# Altium PCB PCB_BSPD_Main.PcbDoc
Units mm, origin at the board's own origin, x right, y up, seen from the top; angles counter-clockwise.
Board outline 58.93 x 45.21 mm, 4 copper layers (Top Layer, Int1, Int2, Bottom Layer), stack 1.369 mm thick; 80 components, 58 nets, 239 pads, 90 vias.
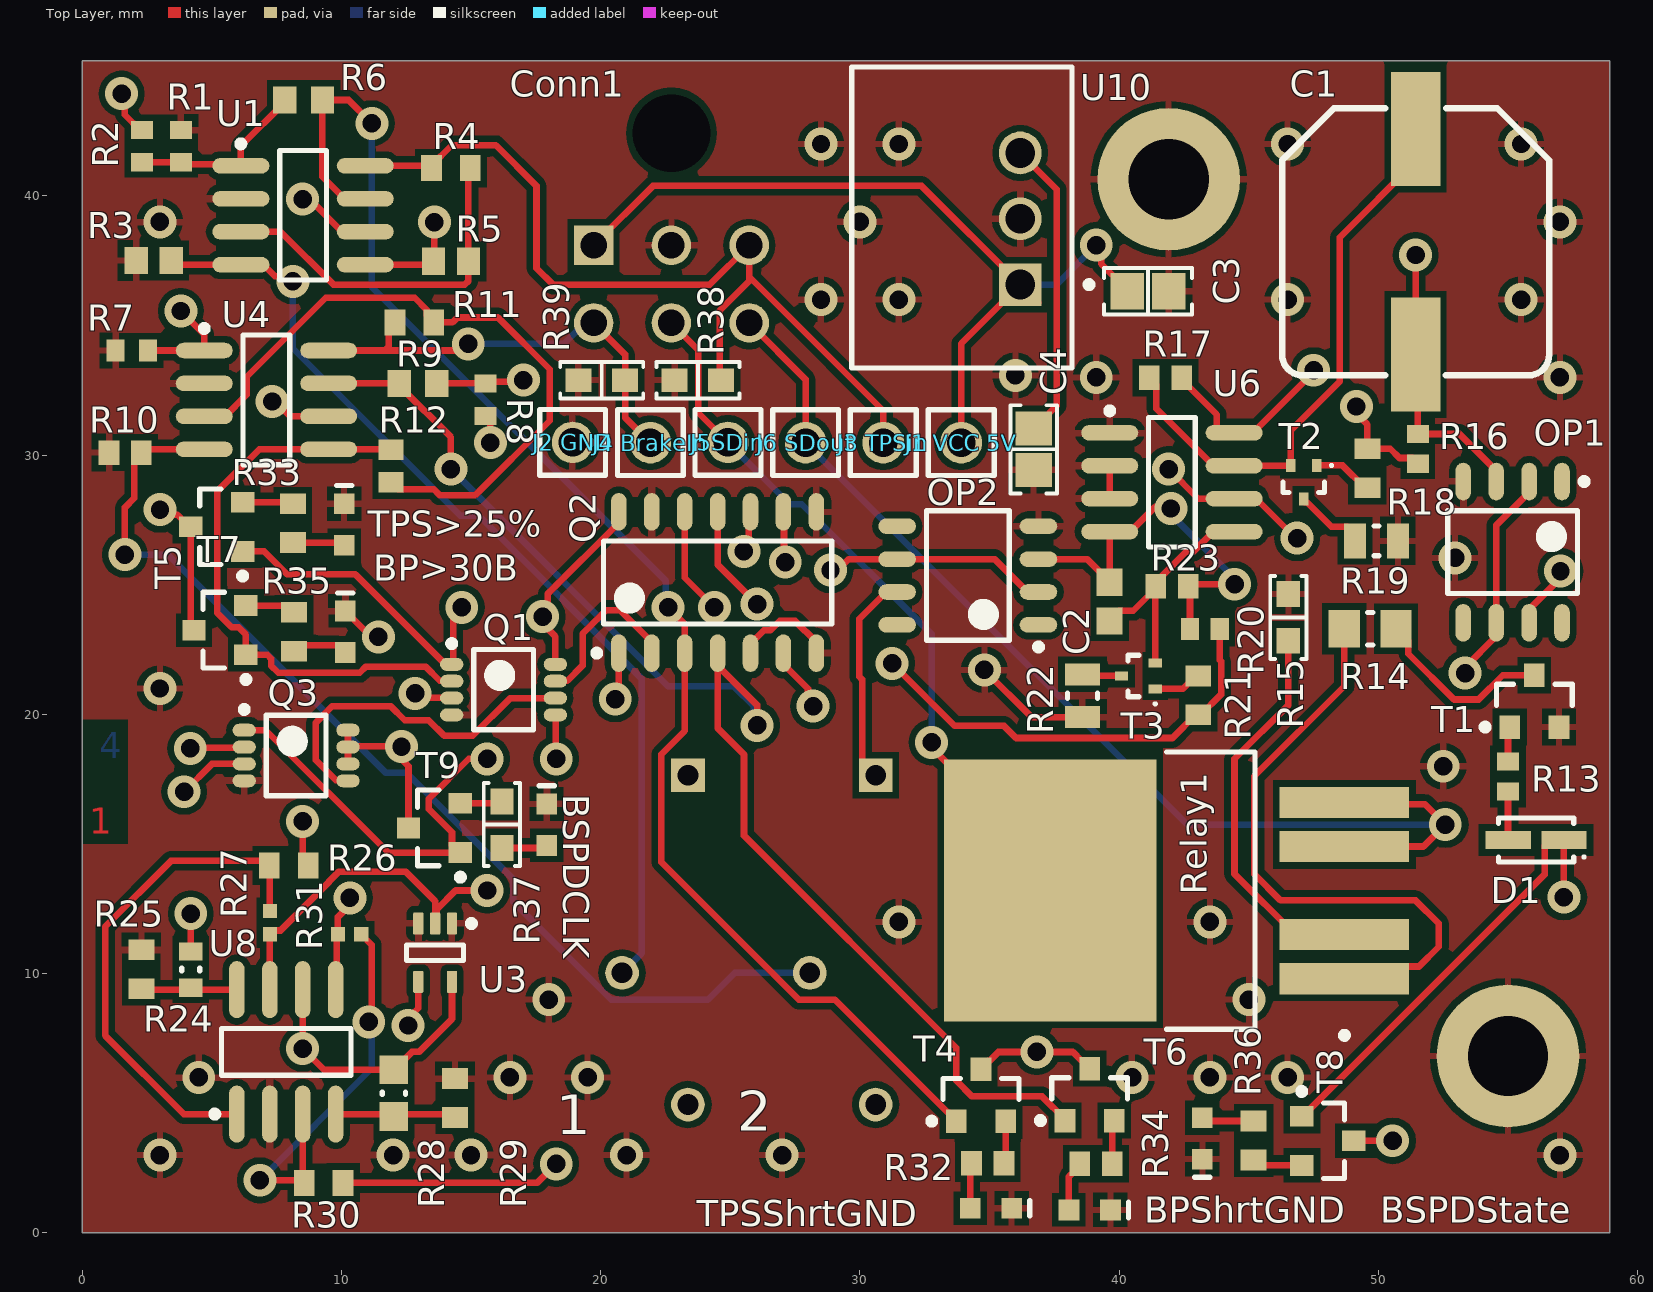
[diagram p0: Top Layer view]
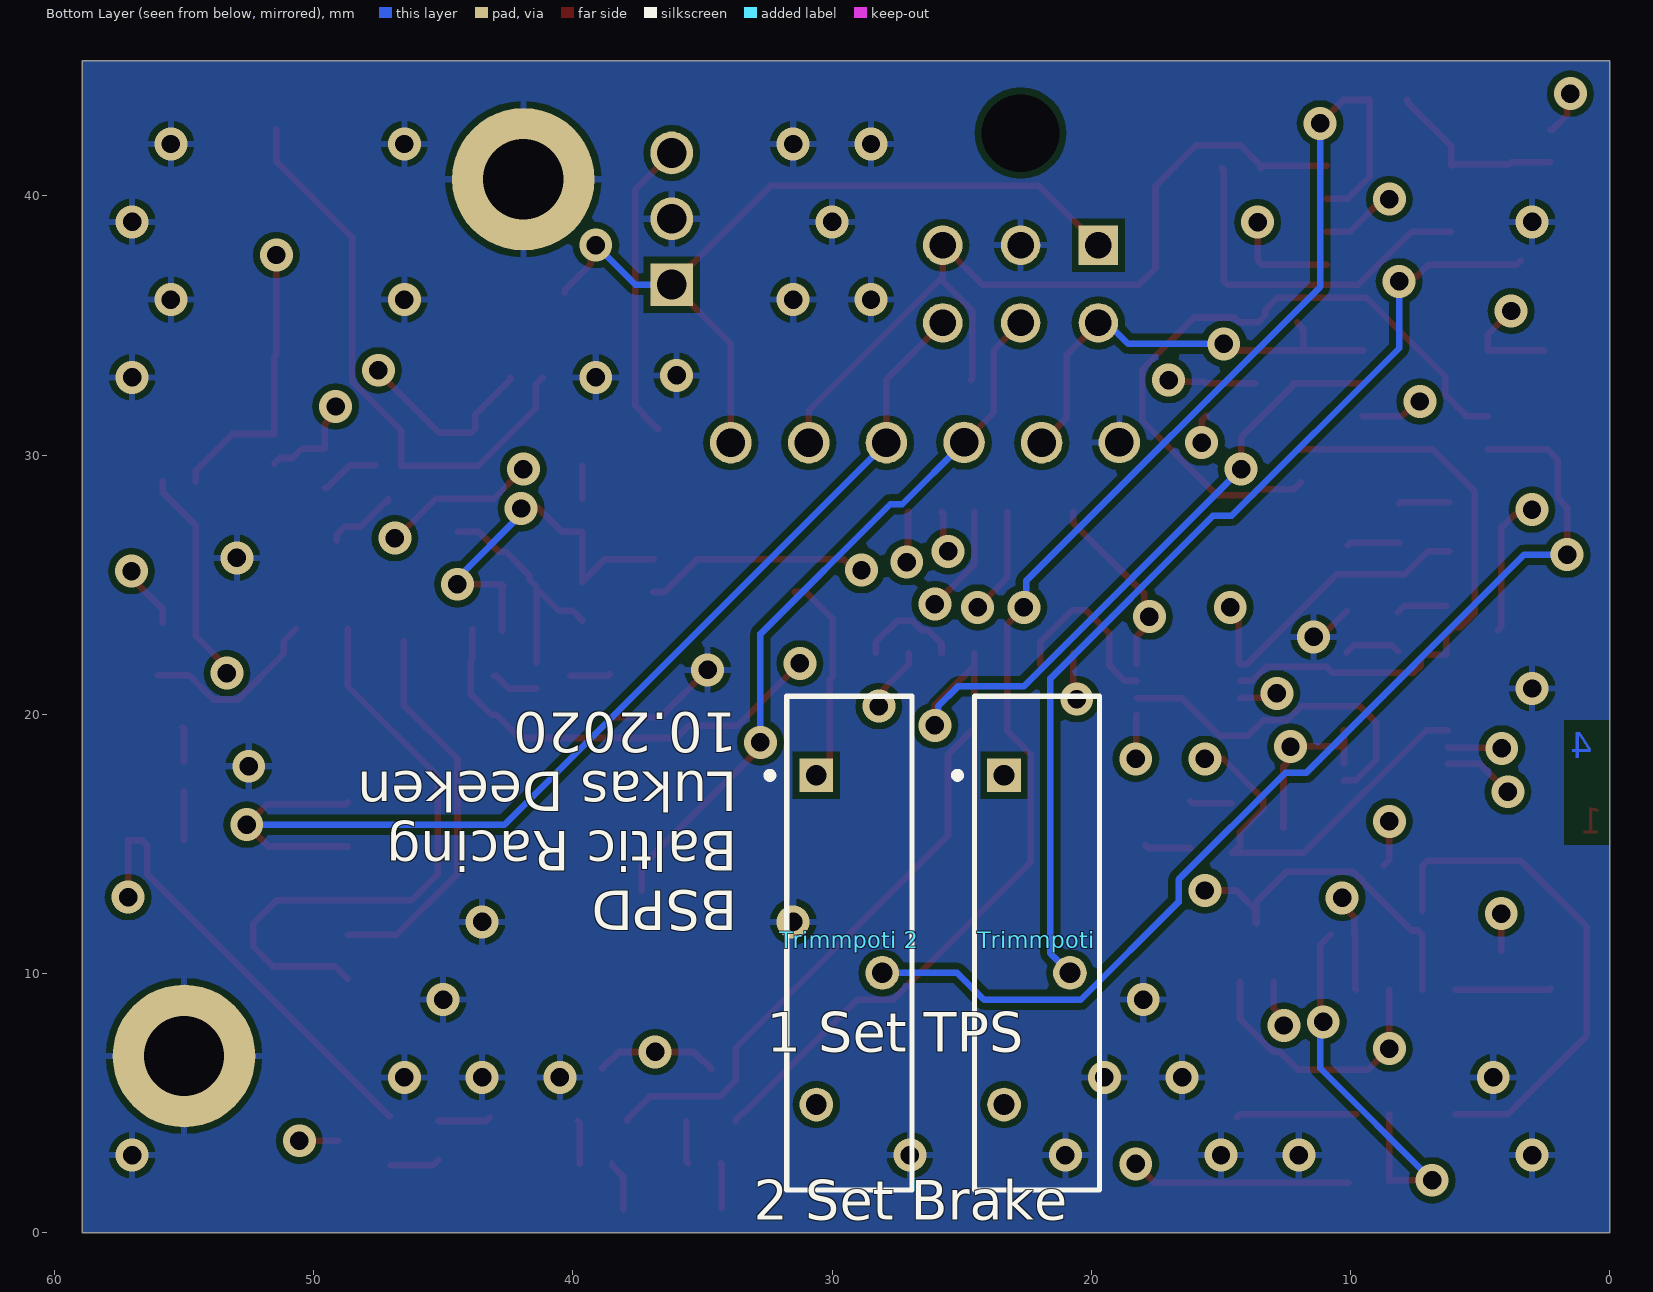
[diagram p1: Bottom Layer view, seen from below]
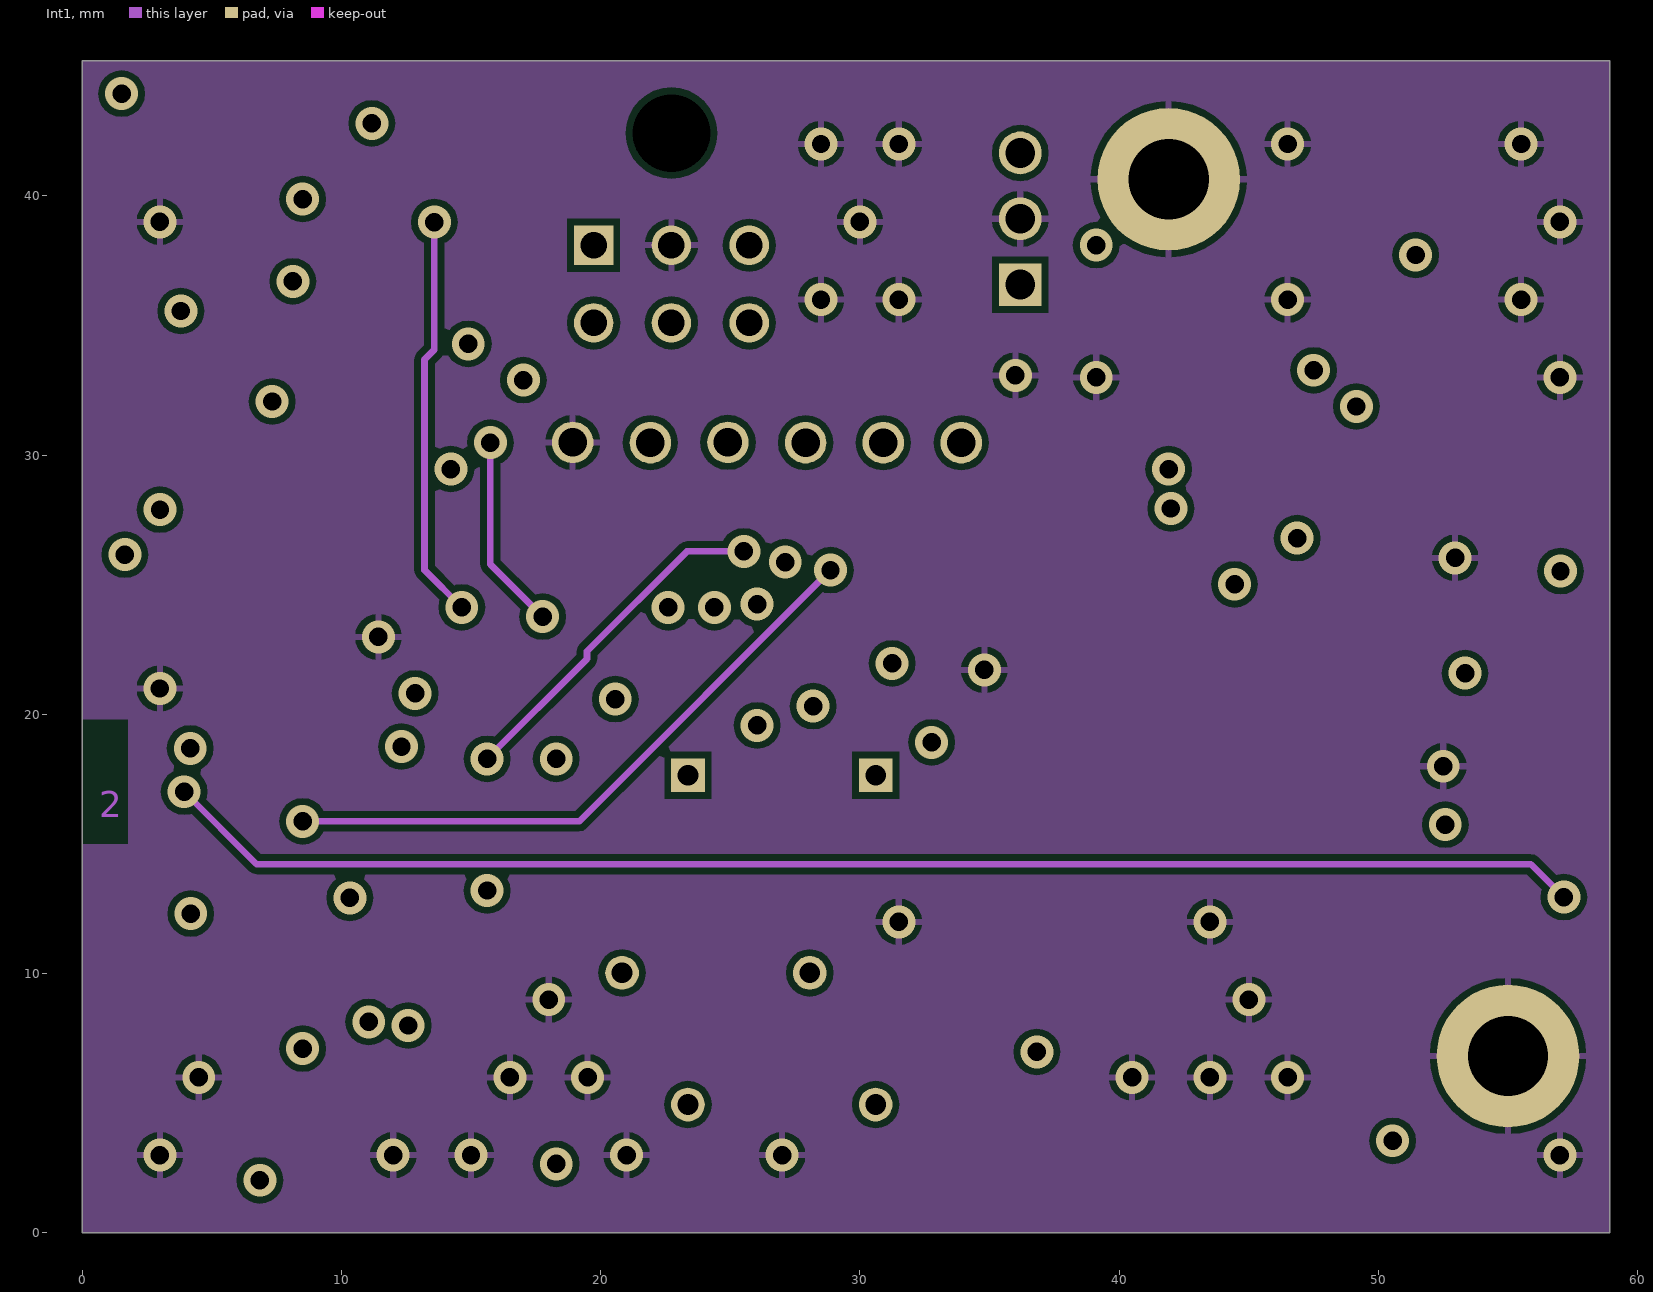
[diagram p2: Int1]
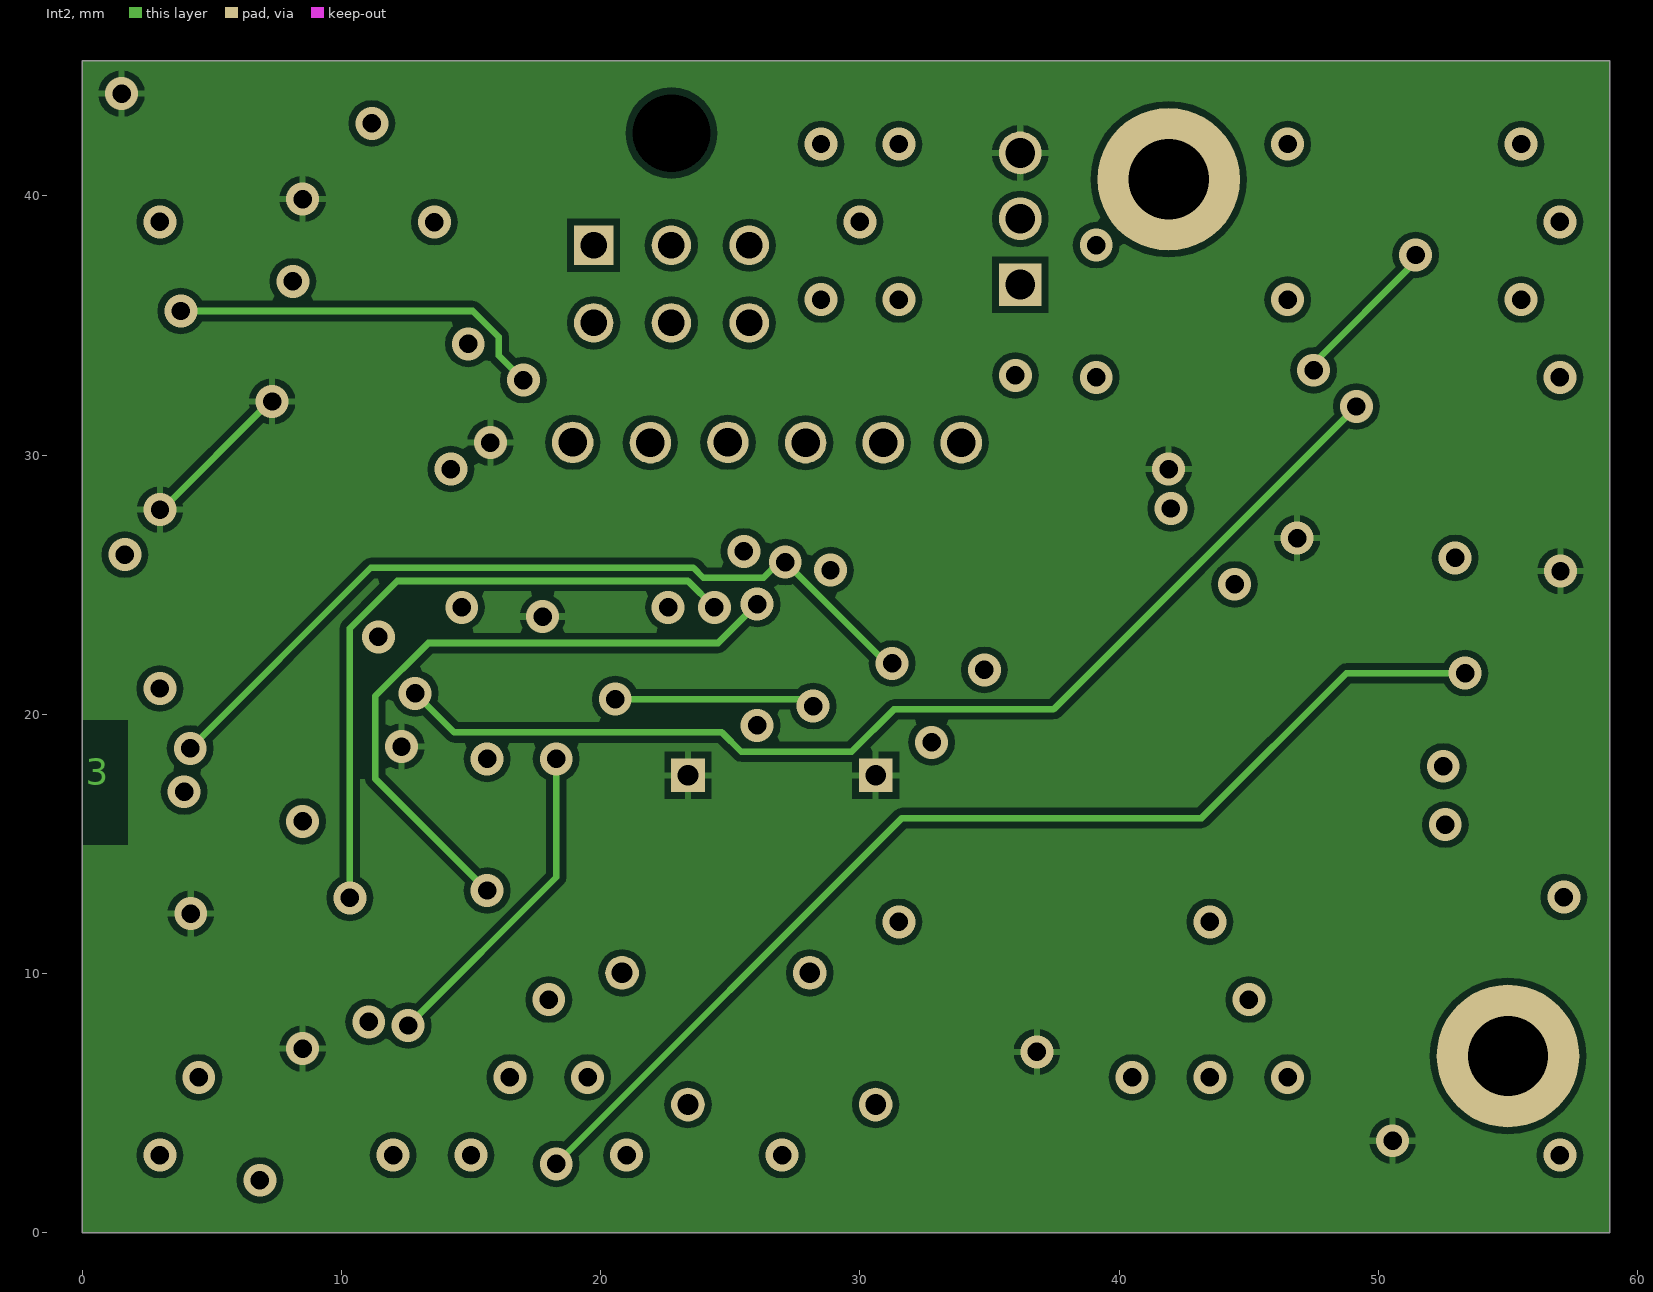
[diagram p3: Int2]

## Layer stack, top to bottom
Top Solder: solder mask 0.0254, SM-001, Dk 4
Top Layer: signal copper 0.035
Dielectric 1: prepreg 0.1295, PP-017, Dk 4.3
Dielectric 2: prepreg 0.1295, PP-017, Dk 4.3
Int1: signal copper 0.035
Dielectric 3: core 0.7112, Core-039, Dk 4.8
Int2: signal copper 0.035
Dielectric 4: prepreg 0.1295, PP-017, Dk 4.3
Dielectric 5: prepreg 0.1295, PP-017, Dk 4.3
Bottom Layer: signal copper 0.035
Bottom Solder: solder mask 0.0254, SM-001, Dk 4

## Board outline
0,0 58.928,0 58.928,45.212 0,45.212

## Design rules (kind name [scope] priority, off if disabled: settings)
Clearance [All] p1: gap=0.254 ignorepadtopadclearanceinfootprint=FALSE except(0: Arc-Hole Track-Hole SMDPad-Hole THPad-Hole Via-Hole Fill-Hole Poly-Hole Region-Hole Text-Hole)
PolygonConnect [All] p1: connectstyle=Relief reliefconductorwidth=0.254 reliefentries=4 polygonreliefangle="90 Angle" airgapwidth=0.254
RoutingVias [All] p1: holewidth=0.711 width=1.27 viastyle="Through Hole" minholewidth=0.711 minwidth=1.27 maxholewidth=0.711 maxwidth=1.27
SolderMaskExpansion [All] p1: expansion=0.102 istentingtop=FALSE
Width [All] p1: maxlimit=0.254 minlimit=0.254 preferedwidth=0.254
30 further rules are at their usual default settings.

## Components (designator, comment, footprint, x,y, rotation, side; value= is the part's Value field where it differs from the comment)
BP>30B "150060GS75000" 0603_A 10.152,23.187 r270 top
BPShrtGND "150060RS75000" 0603_A 38.862,0.889 r180 top
BSPDCLK "150060BS75000" 0603_A 17.923,15.748 r270 top
BSPDState "150060GS75000" 0603_A 43.209,3.645 r90 top
C1 "875075561006" WCAP-PSLC_10x12.4 51.435,38.227 r90 top value=150uF
C2 "C0603C335M9PACTU" CAPC1608X90X35NL15T15 39.63,24.352 r270 top
C3 "SMD Capacitor" "CAP 0805/2012" 41.114,36.322 r180 top value=10uF
C4 "SMD Capacitor" "CAP 0805/2012" 36.703,30.226 r90 top value=10uF
Conn1 "43045-0600" 43045-0600 22.73,38.098 r180 top
D1 "BAT46WH" DIOM2715X18N 56.082,15.152 r180 top
"J1 VCC 5V" "61300111121" 61300111121 33.909,30.48 r270 top
"J2 GND" "61300111121" 61300111121 18.923,30.491 r270 top
"J3 TPSin" "61300111121" 61300111121 30.9,30.48 r270 top
"J4 BrakeIn" "61300111121" 61300111121 21.917,30.48 r270 top
J5SDin "61300111121" 61300111121 24.912,30.491 r270 top
"J6 SDout" "61300111121" 61300111121 27.906,30.48 r90 top
OP1 "AD711" "SOIC8; SOIC127P600X175-8N" 55.175,26.257 r270 top
OP2 "AD711" "SOIC8; SOIC127P600X175-8N" 34.163,25.357 r180 top
Q1 "Dual 2 input AND gate" "TSSOP8; TSOP65P400X110-8N" 16.256,20.955 r0 top
Q2 "Triple Input OR Gate" "SOIC14; SOIC127P600X175-14N" 24.511,25.088 r90 top
Q3 "74LVC1G74" "TSSOP8; TSOP65P400X110-8N" 8.255,18.415 r0 top
R1 "ERJ-3EKF1022V" RESC1608X55X30LL15T15 3.81,41.92 r90 top
R2 "ERJ-3EKF4753V" RESC1608X55X30LL15T15 2.306,41.919 r270 top
R3 "CRCW060325K5FKEA" RESC1609X50X30ML10T20 2.76,37.502 r0 top
R4 "RC0603FR-0710KL" RESC1608X55X25ML10T15 14.226,41.072 r0 top
R5 "CRCW0603402KFKEA" RESC1609X50X30ML10T20 14.226,37.475 r180 top
R6 "ERJ-3EKF2433V" RESC1608X55X30ML15T15 8.546,43.698 r0 top
R7 "ERJ-3EKF1022V" RESC1608X55X30LL15T15 1.915,34.036 r180 top
R8 "ERJ-3EKF4753V" RESC1608X55X30LL15T15 15.558,32.141 r90 top
R9 "ERJ-3EKF2433V" RESC1608X55X30ML15T15 12.954,32.766 r180 top
R10 "CRCW060313K0FKEA" RESC1609X50X30NL10T20 1.661,30.099 r0 top
R11 "RC0603FR-0710KL" RESC1608X55X25ML10T15 12.816,35.12 r0 top
R12 "CRCW0603249KFKEA" RESC1609X50X30NL10T20 11.916,29.581 r90 top
R13 "CRCW060330K0FKEA" RESC1609X50X30LL10T20 54.998,17.606 r90 top
R14 "RC0805FR-071KL" RESC2013X60X35ML10T20 49.68,23.304 r180 top
R15 "SMD Resistor" "STACKPOLE CSR0603" 46.526,23.741 r270 top value="510 0603"
R16 "CRCW060397K6FKEA" RESC1609X50X30LL10T20 51.521,30.242 r90 top
R17 "CRCW0603499KFKEA" RESC1609X50X30NL10T20 41.789,32.99 r180 top
R18 "RC0603FR-07100KL" RESC1608X55X25ML10T15 49.574,29.497 r270 top
R19 "CRCW0805100RFKEA" RESC2013X50X30LL20T20 49.924,26.693 r0 top
R20 "CRCW060397K6FKEA" RESC1609X50X30LL10T20 43.307,23.289 r180 top
R21 "RC0603FR-07100KL" RESC1608X55X25ML10T15 43.05,20.735 r90 top
R22 "CRCW0805100RFKEA" RESC2013X50X30LL20T20 38.585,20.723 r270 top
R23 "CRCW0603499KFKEA" RESC1609X50X30NL10T20 42.037,24.943 r180 top
R24 "51K1 1% 0603(1608)" RESC0603(1608)_L 4.191,10.16 r90 top value="51100.00 Ohm"
R25 "RC0603FR-07100KL" RESC1608X55X25ML10T15 2.286,10.172 r270 top
R26 "RC0603FR-0710KL" RESC1608X55X25ML10T15 7.973,14.171 r180 top
R27 "ERJ-2RKF1243X" RESC1005X40X25NL05T05 7.245,11.967 r270 top
R28 "118K 1% 0603(1608)" RESC0603(1608)_M 12.028,5.391 r90 top value="118000.00 Ohm"
R29 "RC0603FR-07100KL" RESC1608X55X25ML10T15 14.382,5.207 r270 top
R30 "RC0603FR-0710KL" RESC1608X55X25ML10T15 9.318,1.929 r180 top
R31 "ERJ-2RKF1243X" RESC1005X40X25NL05T05 10.318,11.517 r180 top
R32 "CRCW0603130KFKEA" RESC1609X50X30NL10T20 34.931,2.681 r0 top
R33 "RC0603FR-07100RL" RESC1608X55X25ML10T15 8.128,27.377 r270 top
R34 "CRCW0603130KFKEA" RESC1609X50X30NL10T20 39.106,2.667 r0 top
R35 "RC0603FR-07100RL" RESC1608X55X25ML10T15 8.172,23.187 r270 top
R36 "RC0603FR-07100RL" RESC1608X55X25ML10T15 45.188,3.568 r90 top
R37 "SMD Resistor" "STACKPOLE CSR0603" 16.193,15.748 r90 top value="500 0603"
R38 "SMD Resistor" "STACKPOLE CSR0603" 23.749,32.89 r180 top value="100k 0603"
R39 "SMD Resistor" "STACKPOLE CSR0603" 20.045,32.89 r180 top value="100k 0603"
Relay1 "AUIR3313S" "D2PAK5 ;DPAK228P1524X483-5N" 41.538,13.205 r180 top
T1 "BC848BLT1G" ONSC-SOT-23-3-318-08_V 56.014,20.51 r90 top
T2 "MMBT3906TT1G" ONSC-SC-75-3-463-01_V 47.117,28.956 r270 top
T3 "MMBT3906TT1G" ONSC-SC-75-3-463-01_V 40.744,21.485 r180 top
T4 "BC848BLT1G" ONSC-SOT-23-3-318-08_V 34.671,5.31 r90 top
T5 "BC848BLT1G" ONSC-SOT-23-3-318-08_V 5.191,27.238 r180 top
T6 "BC848BLT1G" ONSC-SOT-23-3-318-08_V 38.862,5.334 r90 top
T7 "BC848BLT1G" ONSC-SOT-23-3-318-08_V 5.318,23.248 r180 top
T8 "BC848BLT1G" ONSC-SOT-23-3-318-08_V 48.042,3.556 r0 top
T9 "BC848BLT1G" ONSC-SOT-23-3-318-08_V 13.589,15.621 r180 top
TPS>25% "150060GS75000" 0603_A 10.107,27.327 r270 top
TPSShrtGND "150060RS75000" 0603_A 35.052,0.952 r180 top
Trimmpoti "3006P-1-104ZLF" BOUR-3006P-3_V 22.098,11.176 r270 bottom
"Trimmpoti 2" "3006P-1-104ZLF" BOUR-3006P-3_V 29.337,11.176 r270 bottom
U1 "LT1017IS8#PBF" LT-S8_N 8.522,39.253 r0 top
U3 "Inverter SN74LVC1G04DCKR" DCK0005A_N 13.617,10.81 r270 top
U4 "LT1017IS8#PBF" LT-S8_N 7.112,32.131 r0 top
U6 "LT1017IS8#PBF" LT-S8_N 42.037,28.956 r0 top
U8 "LT1017IS8#PBF" LT-S8_N 7.874,6.985 r90 top
U10 "R-78E5.0-0.5" REPO-R-78E-0.5-3_V 36.185,39.116 r90 top

## Footprints (in the part's own frame and the unit in brackets; to place one, negate y for a bottom-side part, rotate by r counter-clockwise, add the part's x,y. Pads: shape width x height; smd on the part's side, far side on the other; paste and mask are expansions set on the pad)
0603_A [mm] "Chip LED, 2-Leads, Body 1.6x0.8mm, IPC Medium Density"
  rect 0.8x0.8 smd: 1(-0.8,0) 2(0.8,0)
  silkscreen extent -1.5,-0.3 -1.5,0.3, body extent -0.8,-0.4 0.8,0.4, height 0.7
43045-0600 [mm] "Micro-Fit 3.0 Right Angle Header, 3.00mm Pitch, Dual Row, 6 Circuits"
  rect 1.524x1.524 hole 1.02: 1(3,0)
  round 1.524 hole 1.02: 2(0,0) 3(-3,0) 4(3,3) 5(0,3) 6(-3,3)
  round 0 hole 3 unplated: ""(0,-4.32)
  body extent -6.57,-8.95 6.57,3.29, height 8.83
61300111121 [mm] "1pins, 1 row, straight, gold plating"
  round 1.6 hole 1.1: 1(0,0)
  silkscreen extent -1.27,-1.27 1.27,1.27, body extent -1.27,-1.27 1.27,1.27, height 8.57
BOUR-3006P-3_V [mm] "THD, 3-Leads, Body 19.05x4.83mm, Height 6.6mm"
  rect 1.3x1.3 hole 0.8: 1(-6.475,-1.27)
  round 1.3 hole 0.8: 2(1.145,1.27) 3(6.225,-1.27)
  silkscreen extent -9.53,-3.19 9.52,2.41, body extent -9.53,-2.41 11.05,2.41, height 6.6
"CAP 0805/2012" [mm] "Chip Capacitor, 2-Leads, Body 2.00x1.20mm, IPC Medium Density"
  rect 1.3x1.4 smd: 1(-0.8,0) 2(0.8,0)
  silkscreen extent -1.7,-0.9 1.7,0.9, body extent -1,-0.64 1,0.64, height 1.26
CAPC1608X90X35NL15T15 [mm] "Chip Capacitor, 2-Leads, Body 1.60x0.81mm, IPC Medium Density"
  rect 1.05x1 smd: 1(-0.75,0) 2(0.75,0)
  body extent -0.88,-0.48 0.87,0.48, height 0.9
"D2PAK5 ;DPAK228P1524X483-5N" [mm] "D2-PAK, 5-Pads, Body 7,93x8,70mm (max), IPC Medium Density"
  rect 5x1.2 smd: 1(-7.15,3.4) 2(-7.15,1.7) 4(-7.15,-1.7) 5(-7.15,-3.4)
  rect 8.2x10.1 smd: 3(4.2,0)
  silkscreen extent -7.28,-5.35 -0.3,5.71, body extent -7.51,-5.33 7.74,5.33, height 4.83
DCK0005A_N [mm] "SOT23, 5-Leads, Body 2.15x1.4mm, Pitch 0.65mm, IPC Medium Density"
  rrect25% 0.85x0.4 smd: 1(-1.125,0.65) 2(-1.125,0) 3(-1.125,-0.65) 4(1.125,-0.65) 5(1.125,0.65)
  silkscreen extent -1.25,-1.1 0.3,1.53, body extent -1.14,-1 1.14,1, height 0.94
DIOM2715X18N [mm] "Molded Diode, 2-Leads, Body 2,70x1,55mm, IPC Medium Density"
  rect 1.75x0.7 smd: 1(-1.075,0) 2(1.075,0)
  silkscreen extent -1.9,-0.85 1.45,0.85, body extent -1.65,-0.85 1.65,0.85, height 1.8
LT-S8_N [mm] "SOP, 8-Leads, Body 4.9x3.9mm, Pitch 1.27mm, IPC Medium Density"
  oval 2.2x0.6 smd: 1(-2.4,1.905) 2(-2.4,0.635) 3(-2.4,-0.635) 4(-2.4,-1.905) 5(2.4,-1.905) 6(2.4,-0.635) 7(2.4,0.635) 8(2.4,1.905)
  silkscreen extent -2.52,-2.5 0.9,2.88, body extent -2,-2.5 2,2.5, height 1.76
ONSC-SC-75-3-463-01_V [mil] "SOT23, 3-Leads, Body 1.6x0.8mm, Pitch 0.5mm"
  rect 20x14.02 smd: 1(-25.49,19.69) 2(-25.49,-19.69) 3(25.49,0)
  silkscreen extent -27,-31 16,44, body extent -16,-31 16,31, height 35
ONSC-SOT-23-3-318-08_V [mm] "SOT23, 3-Leads, Body 2.92x1.3mm, Pitch 0.95mm"
  rect 0.9x0.8 smd: 1(-1,0.95) 2(-1,-0.95) 3(1,0)
  silkscreen extent -1.12,-1.46 0.65,2.02, body extent -0.65,-1.46 0.65,1.46, height 1.11
REPO-R-78E-0.5-3_V [mm] "THD, 3-Leads, Body 11.6x8.5mm, Pitch 2.54mm"
  rect 1.65x1.65 hole 1.15: 1(-2.54,0)
  round 1.65 hole 1.15: 2(0,0) 3(2.54,0)
  silkscreen extent -5.75,-2.78 5.85,6.5, body extent -5.75,-2 5.85,6.5, height 10.4
RESC0603(1608)_L [mm] "Chip Resistor, Body 1.6x0.8mm, IPC High Density"
  rect 0.7x0.9 smd: 1(-0.7,0) 2(0.7,0)
  silkscreen extent -0.05,-0.35 0.05,0.35, body extent -0.85,-0.47 0.85,0.47, height 0.6
RESC0603(1608)_M [mm] "Chip Resistor, Body 1.6x0.8mm, IPC Low Density"
  rect 1.1x1.1 smd: 1(-0.9,0) 2(0.9,0)
  silkscreen extent -0.05,-0.45 0.05,0.45, body extent -0.85,-0.47 0.85,0.47, height 0.6
RESC1005X40X25NL05T05 [mm] "Chip Resistor, 2-Leads, Body 1.00x0.50mm, IPC Medium Density"
  rect 0.55x0.55 smd: 1(-0.45,0) 2(0.45,0)
  body extent -0.53,-0.27 0.53,0.28, height 0.4
RESC1608X55X25ML10T15 [mm] "Chip Resistor, 2-Leads, Body 1.60x0.80mm, IPC Low Density"
  rect 0.8x1 smd: 1(-0.75,0) 2(0.75,0)
  body extent -0.85,-0.45 0.85,0.45, height 0.55
RESC1608X55X30LL15T15 [mm] "Chip Resistor, 2-Leads, Body 1.60x0.80mm, IPC High Density"
  rect 0.7x0.85 smd: 1(-0.625,0) 2(0.625,0)
  body extent -0.87,-0.48 0.87,0.48, height 0.55
RESC1608X55X30ML15T15 [mm] "Chip Resistor, 2-Leads, Body 1.60x0.80mm, IPC Low Density"
  rect 0.9x1.05 smd: 1(-0.725,0) 2(0.725,0)
  body extent -0.87,-0.48 0.87,0.48, height 0.55
RESC1609X50X30LL10T20 [mm] "Chip Resistor, 2-Leads, Body 1.55x0.85mm, IPC High Density"
  rect 0.7x0.85 smd: 1(-0.575,0) 2(0.575,0)
  body extent -0.82,-0.48 0.82,0.48, height 0.5
RESC1609X50X30ML10T20 [mm] "Chip Resistor, 2-Leads, Body 1.55x0.85mm, IPC Low Density"
  rect 0.9x1.05 smd: 1(-0.675,0) 2(0.675,0)
  body extent -0.82,-0.48 0.82,0.48, height 0.5
RESC1609X50X30NL10T20 [mm] "Chip Resistor, 2-Leads, Body 1.55x0.85mm, IPC Medium Density"
  rect 0.8x0.95 smd: 1(-0.625,0) 2(0.625,0)
  body extent -0.82,-0.48 0.82,0.48, height 0.5
RESC2013X50X30LL20T20 [mm] "Chip Resistor, 2-Leads, Body 2.00x1.25mm, IPC High Density"
  rect 0.85x1.35 smd: 1(-0.825,0) 2(0.825,0)
  silkscreen extent -0.1,-0.57 0.1,0.57, body extent -1.1,-0.72 1.1,0.72, height 0.5
RESC2013X60X35ML10T20 [mm] "Chip Resistor, 2-Leads, Body 2.1x1.35mm, IPC Low Density"
  rect 1.2x1.45 smd: 1(-1,0) 2(1,0)
  silkscreen extent -0.1,-0.63 0.1,0.63, body extent -1.05,-0.68 1.05,0.67, height 0.6
"SOIC8; SOIC127P600X175-8N" [mm] "SOIC, 8-Leads, Body 4,90x3,90mm, Pitch 1,27mm, IPC Medium Density"
  oval 1.45x0.6 smd: 1(-2.725,1.905) 2(-2.725,0.635) 3(-2.725,-0.635) 4(-2.725,-1.905) 5(2.725,-1.905) 6(2.725,-0.635) 7(2.725,0.635) 8(2.725,1.905)
  silkscreen extent -2.85,-2.5 1.6,2.88, body extent -2,-2.5 2,2.5, height 1.75
"SOIC14; SOIC127P600X175-14N" [mm] "SOIC, 14-Leads, Body 8,65x3,90mm, Pitch 1,27mm, IPC Medium Density"
  oval 1.45x0.6 smd: 1(-2.725,3.81) 2(-2.725,2.54) 3(-2.725,1.27) 4(-2.725,0) 5(-2.725,-1.27) 6(-2.725,-2.54) 7(-2.725,-3.81) 8(2.725,-3.81) 9(2.725,-2.54) 10(2.725,-1.27) 11(2.725,0) 12(2.725,1.27) 13(2.725,2.54) 14(2.725,3.81)
  silkscreen extent -2.85,-4.4 1.6,4.78, body extent -3,-4.4 3,4.4, height 1.75
"STACKPOLE CSR0603" [mm] "Chip Resistor, 2-Leads, Body 1.60x0.80mm, IPC Medium Density"
  rect 1x0.9 smd: 1(-0.9,0) 2(0.9,0)
  silkscreen extent -1.6,-0.7 1.6,0.7, body extent -0.85,-0.4 0.85,0.4, height 0.45
"TSSOP8; TSOP65P400X110-8N" [mm] "TSOP, 8-Leads, Body 3,00x3,00mm, Pitch 0,65mm, IPC Medium Density"
  oval 0.9x0.5 smd: 1(-2,0.975) 2(-2,0.325) 3(-2,-0.325) 4(-2,-0.975) 5(2,-0.975) 6(2,-0.325) 7(2,0.325) 8(2,0.975)
  silkscreen extent -2.12,-1.55 1.15,1.9, body extent -1.55,-1.55 1.55,1.55, height 1.1
WCAP-PSLC_10x12.4 [mm] "Aluminium Polymer V-Chip SMT Capacitors, §¶10x12.4mm"
  rect 4.4x1.9 smd: 1(4.35,0) 2(-4.35,0)
  silkscreen extent -5.15,-5.15 5.15,5.15, body extent -5.5,-5.15 5.5,5.15, height 12.4

## Part data
BP>30B BSPDState TPS>25%: library part CMP-1426-00002-1, "SMD mono-color Chip LED, WL-SMCW, Green", Color=Green, Manufacturer="Wuerth Elektronik", ComponentLink1Description="Manufacturer URL", ComponentLink1URL=http://www.we-online.com, ComponentLink2Description=Datasheet, ComponentLink2URL=http://katalog.we-online.com/led/datasheet/150060GS75000.pdf, PackageReference=0603_A, PartNumber=150060GS75000
BPShrtGND TPSShrtGND: library part CMP-1426-00001-1, "SMD mono-color Chip LED, WL-SMCW, Red", Color=Red, Manufacturer="Wuerth Elektronik", ComponentLink1Description="Manufacturer URL", ComponentLink1URL=http://www.we-online.com, ComponentLink2Description=Datasheet, ComponentLink2URL=http://katalog.we-online.com/led/datasheet/150060RS75000.pdf, PackageReference=0603_A, PartNumber=150060RS75000
BSPDCLK: library part CMP-1426-00003-1, "SMD mono-color Chip LED, WL-SMCW, Blue", Color=Blue, Manufacturer="Wuerth Elektronik", ComponentLink1Description="Manufacturer URL", ComponentLink1URL=http://www.we-online.com, ComponentLink2Description=Datasheet, ComponentLink2URL=http://katalog.we-online.com/led/datasheet/150060BS75000.pdf, PackageReference=0603_A, PartNumber=150060BS75000
C1: "WCAP-PSLC Aluminum Polymer Capacitors, size Ф10x12.4mm, 25V DC, 150uF", Operating Temperature="-55 °C up to +105 °C", Rated Voltage="25V DC", ComponentLink1Description=Manufacturer, ComponentLink1URL=http://www.we-online.de, ComponentLink2Description=Datasheet, ComponentLink2URL=http://katalog.we-online.de/pbs/datasheet/875075561006.pdf, Life Cycle=2000h, Part Number=875075561006, Published Date="June 2017", Publisher="Wurth Elektronik", Size=Ф10x12.4mm
C2: library part CMP-2006-02261-1, Manufacturer=Kemet, Part Number=C0603C335M9PACTU
C3 C4: "Capacitor with multiple Footprints"
Conn1: library part "MicroFit3.0 6-Pin", "Molex Micro-Fit 3.0 6-Pin / 600V / 8.5A"
"J1 VCC 5V" "J2 GND" "J3 TPSin" "J4 BrakeIn" J5SDin "J6 SDout": "WR-PHD 2.54 mm THT Pin Header, 1p", Rated Current="3 A", Withstanding Voltage="500 VAC", Working Voltage="250 VAC", ComponentLink1Description=Manufacturer, ComponentLink1URL=http://www.we-online.de, ComponentLink2Description=Datasheet, ComponentLink2URL=http://katalog.we-online.de/em/datasheet/6130xx11121.pdf, Part Number=61300111121, Pin Number=1, Pitch="2.54 mm", Published Date="Aug 2017", Publisher="Wurth Elektronik"
OP1 OP2: Supplier Part Number 1=584-AD711JRZ, Supplier 1=Mouser
Q1: library part 74LVC2G08-Q100, Supplier Part Number 1=771-74LVC2G08DP-G, Supplier 1=Mouser
Q2: library part 74HCT4075D,653, Supplier Part Number 1=771-74HCT4075D-T, Supplier 1=Mouser
Q3: Supplier Part Number 1=771-LVC1GDP125, Supplier 1=Mouser
R1 R7: library part CMP-2000-00185-1, Manufacturer=Panasonic, Part Number=ERJ-3EKF1022V
R2 R8: library part CMP-2000-00528-1, Manufacturer=Panasonic, Part Number=ERJ-3EKF4753V
R3: library part CMP-2000-03129-1, Manufacturer="Vishay Dale", Part Number=CRCW060325K5FKEA
R4 R11 R26 R30: library part CMP-2100-03664-1, "Chip Resistor, 10 KOhm, +/- 1%, 01 W, -55 to 155 degC, 0603 (1608 Metric), RoHS, Tape and Reel", Case Code (Imperial)=0603, Case Code (Metric)=1608, Manufacturer=Yageo, Max Operating Temperature=155degC, Min Operating Temperature=-55degC, Package Description="2-Pin Surface Mount Device, Body 1.6 x 0.8 mm", Power Rating=100mW, Resistance=10KOhm, Temperature Coefficient=100ppm/degreesC, Tolerance=1%, Voltage Rating=75V, Voltage Rating (DC)=50V, Case/Package=0603, Composition=ThickFilm, Datasheet URL=http://www.yageo.com/NewPortal/yageodocoutput?fileName=/pdf/R-Chip/PYu-RC_Group_51_RoHS_L_5.pdf, Datasheet Version="Rev. 5, 10/2016", Depth=0.8mm, Height=0.45mm, Lead Free=LeadFree, Lead Pitch=0.3mm, Length=1.6mm, Manufacturer URL=http://www.yageo.com/, Military Standard=Not, Number of Pins=2, Package Reference=0603, Packaging=TapeandReel, REACH SVHC=NoSVHC, RoHSCompliant=true, Termination=SMD/SMT, Weight=7.1E-05oz, Width=0.8mm
R5: library part CMP-2000-03334-1, Manufacturer="Vishay Dale", Part Number=CRCW0603402KFKEA
R6 R9: library part CMP-2000-00367-1, Manufacturer=Panasonic, Part Number=ERJ-3EKF2433V
R10: library part CMP-2000-03895-1, Manufacturer="Vishay Dale", Part Number=CRCW060313K0FKEA
R12: library part CMP-2000-03115-1, Manufacturer="Vishay Dale", Part Number=CRCW0603249KFKEA
R13: library part CMP-2000-03223-1, Manufacturer="Vishay Dale", Part Number=CRCW060330K0FKEA
R14: library part CMP-2100-03671-1, "Chip Resistor, 1 KOhm, +/- 1%, 125 mW, -55 to 155 degC, 0805 (2012 Metric), RoHS, Tape and Reel", Case Code (Imperial)=0805, Case Code (Metric)=2012, Manufacturer=Yageo, Max Operating Temperature=155degC, Max Power Dissipation=125mW, Min Operating Temperature=-55degC, Package Description="2-Pin Surface Mounted Device, Body 2 x 1.25 mm", Package Quantity=1, Resistance=1KOhm, Temperature Coefficient=100ppm/degreesC, Tolerance=1%, Voltage Rating=150V, Case/Package=0805, Composition=ThickFilm, Datasheet URL=http://www.yageo.com/NewPortal/yageodocoutput?fileName=/pdf/R-Chip/PYu-RC_Group_51_RoHS_L_5.pdf, Datasheet Version="Rev. 5, 10/2016", Depth=1.25mm, Height=0.024inch, Lead Free=LeadFree, Length=0.079inch, Manufacturer URL=http://www.yageo.com/, Military Standard=Not, Number of Pins=2, Number of Terminations=2, Package Reference=0805, Packaging=TapeandReel, Power Rating=125mW, REACH SVHC=Unknown, RoHSCompliant=true, Termination=SMD/SMT, Voltage Rating (DC)=150V, Width=0.049inch
R15 R37 R38 R39: "Resistor with multiple footprints"
R16 R20: library part CMP-2000-03650-1, Manufacturer="Vishay Dale", Part Number=CRCW060397K6FKEA
R17 R23: library part CMP-2000-03389-1, Manufacturer="Vishay Dale", Part Number=CRCW0603499KFKEA
R18 R21 R25 R29: library part CMP-2100-03662-1, "Chip Resistor, 100 KOhm, +/- 1%, 0.1 W, -55 to 155 degC, 0603 (1608 Metric), RoHS, Tape and Reel", Case Code (Imperial)=0603, Case Code (Metric)=1608, Manufacturer=Yageo, Max Operating Temperature=155degC, Min Operating Temperature=-55degC, Package Description="2-Pin Surface Mount Device, Body 1.6 x 0.8 mm", Power Rating=100mW, Resistance=100KOhm, Temperature Coefficient=100ppm/degreesC, Tolerance=1%, Voltage Rating=50V, Case/Package=0603, Composition=ThickFilm, Datasheet URL=http://www.yageo.com/NewPortal/yageodocoutput?fileName=/pdf/R-Chip/PYu-RC_Group_51_RoHS_L_5.pdf, Datasheet Version="Rev. 5, 10/2016", Depth=0.8mm, Height=0.45mm, Lead Free=LeadFree, Length=1.6mm, Manufacturer URL=http://www.yageo.com/, Military Standard=Not, Number of Pins=2, Package Reference=0603, Packaging=TapeandReel, REACH SVHC=NoSVHC, RoHSCompliant=true, Termination=SMD/SMT, Voltage Rating (DC)=50V, Width=0.8mm
R19 R22: library part CMP-2001-04901-1, Manufacturer="Vishay Dale", Part Number=CRCW0805100RFKEA
R24: library part CMP-1012-00704-1, "51K1 0.1W 1% 0603 (1608 Metric)  SMD", Case-EIA=0603, Case-Metric=1608, Power="0.1 W", Tolerance="1 %", Technology=SMT
R27 R31: library part CMP-2002-00654-1, Manufacturer=Panasonic, Part Number=ERJ-2RKF1243X
R28: library part CMP-1012-00743-1, "118K 0.1W 1% 0603 (1608 Metric)  SMD", Case-EIA=0603, Case-Metric=1608, Power="0.1 W", Tolerance="1 %", Technology=SMT
R32 R34: library part CMP-2000-03887-1, Manufacturer="Vishay Dale", Part Number=CRCW0603130KFKEA
R33 R35 R36: library part CMP-2100-03663-1, "Chip Resistor, 100 Ohm, +/- 1%, 0.1 W, -55 to 155 degC, 0603 (1608 Metric), RoHS, Tape and Reel", Case Code (Imperial)=0603, Case Code (Metric)=1608, Manufacturer=Yageo, Max Operating Temperature=155degC, Min Operating Temperature=-55degC, Package Description="2-Pin Surface Mount Device, Body 1.6 x 0.8 mm", Power Rating=100mW, Resistance=100Ohm, Temperature Coefficient=100ppm/degreesC, Tolerance=1%, Voltage Rating=50V, Case/Package=0603, Composition=ThickFilm, Datasheet URL=http://www.yageo.com/NewPortal/yageodocoutput?fileName=/pdf/R-Chip/PYu-RC_Group_51_RoHS_L_5.pdf, Datasheet Version="Rev. 5, 10/2016", Depth=0.8mm, Height=0.45mm, Lead Free=LeadFree, Length=1.6mm, Manufacturer URL=http://www.yageo.com/, Military Standard=Not, Number of Pins=2, Package Reference=0603, Packaging=TapeandReel, REACH SVHC=Unknown, RoHSCompliant=true, Termination=SMD/SMT, Voltage Rating (DC)=50V, Width=0.8mm
T1 T4 T5 T6 T7 T8 T9: library part CMP-1048-00679-1, "General Purpose Transistor, NPN Silicon, 3-Pin SOT-23, Pb-Free, Tape and Reel", Manufacturer="On Semiconductor", ComponentLink1Description="Manufacturer URL", ComponentLink1URL=http://www.onsemi.com/, ComponentLink2Description=Datasheet, ComponentLink2URL=http://www.onsemi.cn/pub_link/Collateral/BC846ALT1-D.PDF, ComponentLink3Description="Package Specification", ComponentLink3URL=http://www.onsemi.cn/pub_link/Collateral/318-08.PDF, DatasheetVersion="Rev. 11", fT Min (MHz)=100, IC Continuous (A)=0.1, Mounting Technology="Surface Mount", PackageDescription="3-Pin Small Outline Transistor, Body 2.92 x 1.3 mm, Pitch 0.95 mm", PackageReference=SOT-23-3-318-08, PackageVersion="Rev. AP, 11/2009", Packing="Tape and Reel", PartNumber=BC848BLT1G, Polarity=NPN, RoHS=TRUE
T2 T3: library part CMP-1048-00413-1, "General Purpose Transistor, PNP Silicon, 3-Pin SC-75, Pb-Free, Tape and Reel", Manufacturer="On Semiconductor", ComponentLink1Description="Manufacturer URL", ComponentLink1URL=http://www.onsemi.com/, ComponentLink2Description=Datasheet, ComponentLink2URL=http://www.onsemi.cn/pub_link/Collateral/MMBT3906TT1-D.PDF, ComponentLink3Description="Package Specification", ComponentLink3URL=http://www.onsemi.com/pub_link/Collateral/463-01.PDF, DatasheetVersion="Rev. 1", fT Min (MHz)=250, IC Continuous (A)=-0.2, Mounting Technology="Surface Mount", PackageDescription="3-Pin Small Outline Transistor, Body 1.6 x 0.8 mm, Pitch 0.5 mm", PackageReference=SC-75-3-463-01, PackageVersion="Rev. F, 07/2005", Packing="Tape and Reel", PartNumber=MMBT3906TT1G, Polarity=PNP, RoHS=TRUE
Trimmpoti "Trimmpoti 2": library part CMP-0975-00010-1, "Trimming Potentiometer, 100K Ohm +/- 10%, -55 to 125 degC, 3-Pin 19.05 x 4.83 x 6.6 mm THD, RoHS", Manufacturer=Bourns, Resistance (kOhm)=100, Resistance Tolerance="+/- 10%", Temperature Range="-55 to 125 degC", ComponentLink1Description="Manufacturer URL", ComponentLink1URL=http://www.bourns.com/, ComponentLink2Description=Datasheet, ComponentLink2URL=http://www.bourns.com/data/global/pdfs/3006.pdf, ComponentLink3Description="Package Specification", ComponentLink3URL=http://www.bourns.com/data/global/pdfs/3006.pdf, DatasheetVersion=Apr-14, Mounting Technology="Through Hole", Number of Turns=15, PackageDescription="3-Pin THD, Body 19.05 x 4.83 mm, Height 6.6 mm", PackageReference=3006P-3, PackageVersion=Apr-14, PartNumber=3006P-1-104ZLF, RoHS=TRUE, Rotational Life="200 Cycles"
U1 U4 U6 U8: library part CMP-0360-00547-2, "Micropower Comparator, 2 Channels, 1.2 to 40 V, -40 to +85 degC, 8-pin SOP (S8)", Generic Part Number=LT1017, Manufacturer="Linear Technology", Supply Current (uA) Guaranteed=60, Supply Current (uA) Typical=30, Supply Voltage Range="1.2 to 40 V", Channels (#)=2, ComponentLink1Description="Manufacturer URL", ComponentLink1URL=http://www.linear.com/, ComponentLink2Description=Datasheet, ComponentLink2URL=http://cds.linear.com/docs/en/datasheet/10178ff.pdf, ComponentLink3Description="Package Specification", ComponentLink3URL=http://cds.linear.com/docs/en/packaging/05081610_G_SO8.pdf, DatasheetVersion="Rev F", Features=Comparator, Mounting Technology="Surface Mount", PackageDescription="8-Pin Plastic Small Outline (Narrow .150 Inch), Body 4.9 x 3.9 mm, Pitch 1.27 mm", PackageReference=S8, PartNumber=LT1017IS8#PBF, Prop Delay (us)=22, RoHS=Y, Vos (mV) Guaranteed=1, Vos (mV) Typical=0.4, Vs Max (V)=40, Vs Min (V)=1.2
U3: library part CMP-0859-00252-3, "Single Inverter, DCK0005A, LARGE T&R", F @ Nom Voltage(Max)(Mhz)=150, Generic Part Number=SN74LVC1G04, ICC @ Nom Voltage(Max)(mA)=0.01, Manufacturer="Texas Instruments", Operating Temperature Range(C)="-40 to 125,-40 to 85", Rating=Catalog, tpd @ Nom Voltage(Max)(ns)=7.5,5.2,4.2,3.7, Voltage(Nom)(V)=1.8,2.5,3.3,5, 3-State Output=No, Bits(#)=1, DatasheetVersion=SCES214AD, Input Type=CMOS/TTL, Logic=Inverting, Output Drive (IOL/IOH)(Max)(mA)=32/-32, Output Type=CMOS, PackageReference=DCK0005A, Schmitt Trigger=No, Sub-Family="Inverting Buffer/Driver", Technology Family=LVC, VCC(Max)(V)=5.5, VCC(Min)(V)=1.65
U10: library part CMP-2000-06922-2, "DC/DC-Converter, 5 V Single Output, 500 mA, -40 to 85 degC, 3-Pin THD, RoHS, Tube", Current - Output (Max)=500mA, Manufacturer="Recom Power", Operating Temperature=-40°C~85°C, Package Description="3-Pin Through Hole Device, Body 11.6 x 8.5 mm, Pitch 2.54 mm", Package Reference="SIP Module", Package Version="Rev. 0", Datasheet URL=http://www.recom-power.com/pdf/Innoline/R-78Exx-0.5.pdf, Datasheet Version=01/2017, Efficiency=92%, Manufacturer URL=http://www.recom-power.com/us/americas/home.html, Mounting Technology=ThroughHole, Number of Outputs=1, Packaging=Tube, VIN Max=28V, VIN Min=7V, VOUT=5V

## Free pads (board coordinates)
  round 5.5 hole 3.1: 2(41.91,40.64) 2(54.997,6.825)

## Via types
v1: diameter 1.27, hole 0.711, Top Layer to Bottom Layer, 90 vias

## Nets (pads, with @x,y where several pads share a name; then routed paths per layer and width w, separated by ;. In a path a pad name is that pad's centre, name@x,y a point inside that pad or via, vN(x,y) a via of type N, cw(c..) or ccw(c..) an arc to the next point about the centre after c; other vN are vias at no path point)
5V: "Trimmpoti 2.1" C4.2 OP1.7 OP2.7 Q1.8 Q2.14 Q3.6 Q3.7 Q3.8 R2.1 R8.1 R24.2 R28.2 T4.3 T5.3 T6.3 T7.3 T8.3 T9.3 Trimmpoti.1 U1.6 U3.5 U4.6 U6.6 U8.6 U10.3 | length 88.1
  Top Layer w0.254: v1(1.524,43.942) 1.649,43.817 1.649,43.127 2.231,42.544 R2.1 ; v1(3.004,27.896) 3.199,27.702 3.677,27.702 4.141,27.238 T5.3 4.191,23.376 T7.3 ; R24.2 v1(4.191,12.319) ; v1(7.331,32.068) 7.459,32.068 8.031,31.496 U4.6 U4.6@9.522,31.506 ; U8.6 v1(8.509,7.112) 9.33,6.291 R28.2 12.722,6.985 12.994,6.985 14.267,8.258 U3.5 ; v1(8.509,39.878) 8.768,39.878 10.028,38.617 U1.6 ; Q3.6 Q3.7 ; Q3.8 Q3.7 ; v1@12.065,18.761 12.065,18.521 12.589,17.997 T9.3 ; v1(12.319,18.761) 11.923,18.761 11.916,18.768 10.283,18.768 Q3.7 ; R8.1@15.548,31.506 R8.1 15.748,31.326 v1(15.748,30.48) ; Q1.8 18.256,23.002 17.762,23.496 v1(17.762,23.771) 17.956,23.965 17.956,24.643 20.701,27.388 Q2.14 ; 30.607,17.651 30.084,18.174 30.084,21.351 29.972,21.463 29.972,23.681 31.013,24.722 OP2.7 ; T4.3 34.671,6.36 34.944,6.633 34.994,6.633 35.342,6.981 v1(36.826,6.981) 38.215,6.981 38.539,6.657 38.589,6.657 38.862,6.384 T6.3 ; U10.3 37.592,40.249 37.592,31.915 37.276,31.599 37.276,31.549 36.753,31.026 C4.2 ; v1(41.91,29.464) 43.053,28.321 U6.6 45.288,28.321 46.812,26.797 v1(46.863,26.797) ; T8.3 v1(50.546,3.556) ; OP1.7 55.81,24.051 57.023,25.264 v1(57.023,25.527)
  Int1 w0.254: v1(15.748,30.48) 15.748,25.785 v1(17.762,23.771)
  Int2 w0.254: v1(3.004,27.896) 3.082,27.896 7.254,32.068 v1(7.331,32.068)
10sIntegrator: OP1.2 OP1.6 R30.1 | length 59.8
  Top Layer w0.254: R30.1 17.55,1.929 v1(18.288,2.667) ; v1(53.34,21.59) 53.34,21.814 54.54,23.014 OP1.6 54.54,27.288 55.81,28.558 OP1.2
  Int2 w0.254: v1(18.288,2.667) 31.623,16.002 43.18,16.002 48.768,21.59 v1(53.34,21.59)
12V: "J1 VCC 5V.1" C3.2 Conn1.1 U10.1 | length 32.9
  Top Layer w0.254: Conn1.1 22.018,40.386 32.375,40.386 U10.1 ; 33.909,30.48 33.909,34.3 U10.1 ; U10.1@36.883,35.878 U10.1 ; v1(39.116,38.1) 39.31,37.906 39.31,37.376 40.314,36.372 C3.2 C3.2@40.314,36.272
  Bottom Layer w0.254: U10.1 37.592,36.576 v1(39.116,38.1)
500msIntegrator: OP2.2 OP2.6 R26.1 | length 34.9
  Top Layer w0.254: v1(8.509,15.875) 8.509,14.385 R26.1 ; v1(28.866,25.564) 29.141,25.564 29.569,25.992 35.193,25.992 36.463,24.722 OP2.2
  Int1 w0.254: v1(8.509,15.875) 19.177,15.875 v1(28.866,25.564)
!BSPDaus: Q1.6 Q3.5 | length 13.6
  Top Layer w0.254: Q3.5 10.236,17.459 9.794,17.459 9.017,18.236 9.017,19.685 9.652,20.32 11.9,20.32 12.443,19.777 13.367,19.777 13.962,19.182 15.07,19.182 16.518,20.63 Q1.6
BP>30Bar: Q1.2 R12.2 T7.1 U4.5 | length 23
  Top Layer w0.254: R12.2 11.896,30.226 U4.5 6.84,30.226 5.207,28.593 5.207,23.921 5.768,23.36 6.038,23.36 6.318,23.08 T7.1 7.143,22.299 7.291,22.15 7.291,21.88 7.565,21.607 10.709,21.607 10.948,21.845 13.249,21.845 13.795,21.299 14.237,21.299 Q1.2
BPShrtGND: Q2.4 R9.2 T6.1 U4.7 | length 51.2
  Top Layer w0.254: U4.7 R9.2 12.229,32.691 14.224,30.696 v1(14.224,29.464) ; Q2.4 Q2.4@24.511,21.891 ; v1(26.035,19.575) 26.035,20.367 Q2.4@24.511,21.891 ; T6.1 37.912,4.384 37.028,5.268 34.324,5.268 33.714,5.878 33.714,7.141 25.529,15.326 25.529,18.453 24.511,19.471 Q2.4@24.511,21.891
  Bottom Layer w0.254: v1(14.224,29.464) 22.606,21.082 25.146,21.082 25.908,20.32 25.908,19.702 v1(26.035,19.575)
BrakeIn: "J4 BrakeIn.1" Conn1.4 R11.1 R39.1 U4.8 | length 17.4
  Top Layer w0.254: U4.8 11.684,34.036 ; R11.1 11.833,34.887 11.833,34.185 11.684,34.036 ; v1(14.895,34.294) 14.637,34.036 11.684,34.036 ; Conn1.4 20.945,33.884 R39.1 20.945,31.453 21.917,30.48
  Bottom Layer w0.254: v1(14.895,34.294) 18.583,34.294 19.387,35.098 Conn1.4
BSPDaus: D1.1 Q3.3 T8.1 | length 75
  Top Layer w0.254: v1(3.937,17.018) 5.009,18.09 Q3.3 ; T8.1 47.092,4.506 56.409,13.822 56.409,14.929 56.632,15.152 D1.1 57.15,15.145 v1(57.15,12.954)
  Int1 w0.254: v1(3.937,17.018) 6.731,14.224 55.88,14.224 v1(57.15,12.954)
BSPDpulse: Q2.10 Q3.1 T9.1 | length 31.7
  Top Layer w0.254: Q3.1 7.086,19.39 11.805,14.671 T9.1@14.539,14.671 ; T9.1 T9.1@14.539,14.671 ; v1(15.621,18.288) 14.917,18.288 13.377,16.748 13.377,16.341 14.266,15.452 14.266,14.944 T9.1@14.539,14.671 ; v1(25.527,26.289) 25.527,26.162 25.273,25.908 25.717,26.352 25.717,27.749 Q2.10
  Int1 w0.254: v1(15.621,18.288) 19.475,22.142 19.475,22.435 23.328,26.289 v1(25.527,26.289)
BSPDreset: Q1.3 R16.1 R18.1 | length 48.2
  Top Layer w0.254: v1(12.848,20.809) 13.008,20.649 14.237,20.649 Q1.3 ; v1(49.149,31.877) 49.149,31.602 49.574,31.177 R18.1 50.455,30.247 50.812,29.89 51.298,29.89 R16.1
  Int2 w0.254: v1(12.848,20.809) 14.353,19.304 24.678,19.304 25.423,18.559 29.677,18.559 31.31,20.193 37.465,20.193 v1(49.149,31.877)
CLKGateReset: Q2.12 R31.2 U8.5 | length 33.6
  Top Layer w0.254: U8.5 9.823,9.429 9.823,11.473 R31.2 9.868,12.185 10.328,12.646 v1(10.328,12.921) ; Q2.12 23.241,25.273 v1(24.384,24.13)
  Int2 w0.254: v1(10.328,12.921) 10.328,23.322 12.152,25.146 23.368,25.146 v1(24.384,24.13)
CLKGateSet: Q2.11 R27.2 U3.2 U8.7 | length 43.3
  Top Layer w0.254: U8.7 7.242,9.388 7.242,11.514 7.393,11.665 7.655,11.665 9.504,13.514 9.504,13.533 9.908,13.937 12.479,13.937 13.617,12.799 U3.2 13.686,12.004 13.686,12.489 14.405,13.208 v1(15.621,13.208) ; Q2.11 24.511,25.781 v1(26.035,24.257)
  Int2 w0.254: v1(15.621,13.208) 11.303,17.526 11.303,20.701 13.357,22.755 24.533,22.755 v1(26.035,24.257)
GND: "J2 GND.1" BP>30B.1 BPShrtGND.1 BSPDCLK.1 BSPDState.1 C3.1 C4.1 Conn1.2 OP1.4 OP2.4 pad.2 Q1.4 Q2.5 Q2.7 Q2.8 Q2.13 Q3.4 R1.2 R3.1 R7.2 R10.1 R15.1 R19.2 R22.2 R25.1 R29.1 R38.2 R39.2 T1.2 TPS>25%.1 TPSShrtGND.1 U1.2 U3.1 U3.3 U4.2 U6.1 U6.2 U6.3 U8.2 U10.2 | length 11.5
  Top Layer w0.254: BP>30B.1 10.958,23.181 11.236,23.181 v1(11.43,22.987) ; Q2.5 25.781,22.731 26.291,23.241 26.541,23.241 26.908,23.608 27.501,23.608 28.321,22.788 Q2.7 ; v1(34.798,21.717) 36.617,19.898 R22.2 ; U6.3 U6.2
  other v1: 3,3 12,3 15,3 21,3 27,3 57,3 4.5,6 16.5,6 19.5,6 40.5,6 43.5,6 46.5,6 18,9 45,9 31.5,12 43.5,12 52.5,18 3,21 52.959,26.035 39.116,33 57,33 36,33.073 28.5,36 31.5,36 46.5,36 55.5,36 3,39 30,39 57,39 28.5,42 31.5,42 46.5,42 55.5,42
NetBP>30B_2: BP>30B.2 R35.2 | length 2.2
  Top Layer w0.254: R35.2 8.395,22.661 9.879,22.661 BP>30B.2
NetBPShrtGND_2: BPShrtGND.2 R34.1 | length 2
  Top Layer w0.254: BPShrtGND.2 38.062,2.173 38.481,2.592 R34.1
NetBSPDCLK_2: BSPDCLK.2 R37.1 | length 1.8
  Top Layer w0.254: R37.1 17.822,14.848 BSPDCLK.2
NetBSPDState_2: BSPDState.2 R36.2 | length 2
  Top Layer w0.254: BSPDState.2 43.336,4.318 R36.2
NetC1_1: C1.1 R17.2 T2.2 U6.7 | length 22.4
  Top Layer w0.254: R17.2 41.437,32.717 41.437,31.791 43.637,29.591 U6.7 44.443,29.597 46.611,29.597 T2.2 46.617,30.956 48.514,32.853 48.514,38.406 51.435,41.327 C1.1
NetC1_2: C1.2 OP1.3 R16.2 R17.1 U6.8 | length 24.4
  Top Layer w0.254: R17.1 42.414,32.915 43.764,31.566 43.764,31.021 43.924,30.861 U6.8 45.161,30.861 47.498,33.198 v1(47.498,33.274) ; v1(51.435,37.719) C1.2 51.521,33.791 R16.2 53.131,30.817 54.54,29.408 OP1.3
  Int2 w0.254: v1(47.498,33.274) 47.498,33.528 51.435,37.465 v1(51.435,37.719)
NetC2_1: C2.1 OP2.3 R20.2 R23.1 U6.4 | length 15.4
  Top Layer w0.254: OP2.3 38.765,25.992 39.63,25.127 C2.1 39.637,25.109 U6.4 40.437,27.051 41.386,28 41.843,28 41.9,27.942 v1(41.995,27.942) ; R20.2@42.732,23.214 R20.2 42.732,24.873 R23.1 42.738,25.019 v1(44.45,25.019)
  Bottom Layer w0.254: v1(41.995,27.942) 41.995,27.708 44.45,25.253 v1(44.45,25.019)
NetC2_2: C2.2 R23.2 T3.2 U6.5 | length 9.3
  Top Layer w0.254: C2.2 39.63,23.627 40.003,24 40.544,24 R23.2@41.391,24.847 ; T3.2 R23.2@41.391,24.847 ; U6.5 43.637,27.051 42.866,26.28 42.585,26.28 41.685,25.38 41.685,25.216 R23.2 41.412,24.868 R23.2@41.391,24.847
NetD1_2: D1.2 R13.1 | length 1.9
  Top Layer w0.254: R13.1 54.998,15.161 D1.2
NetQ1_5: Q1.5 U3.4 | length 16.2
  Top Layer w0.254: v1(12.573,8.001) 12.573,8.276 12.967,8.67 U3.4 ; Q1.5 18.272,19.964 18.272,18.304 v1(18.288,18.288)
  Int2 w0.254: v1(12.573,8.001) 18.288,13.716 v1(18.288,18.288)
NetR1_1: R1.1 R2.2 R6.1 U1.1 | length 7.1
  Top Layer w0.254: R2.2 R1.1 3.881,41.224 6.056,41.224 U1.1 6.122,41.924 7.821,43.623 R6.1
NetR3_2: R3.2 Trimmpoti.2 U1.4 | length 38
  Top Layer w0.254: R3.2 3.59,37.347 U1.4 6.985,37.347 7.435,36.897 7.934,36.897 v1(8.128,36.703)
  Bottom Layer w0.254: v1(8.128,36.703) 8.128,34.123 14.592,27.659 15.311,27.659 21.581,21.389 21.581,10.784 Trimmpoti.2
NetR4_2: R4.2 R5.1 U1.3 | length 14.1
  Top Layer w0.254: U1.3 7.65,38.617 9.692,36.576 12.936,36.576 12.943,36.568 14.752,36.568 14.901,36.717 R5.1 14.901,40.997 R4.2
NetR7_1: R7.1 R8.2 R9.1 U4.1 | length 22.2
  Top Layer w0.254: R7.1 U4.1 4.712,34.658 v1(3.81,35.56) ; R9.1 R8.2 15.622,32.829 16.954,32.829 v1(17.018,32.893)
  Int2 w0.254: v1(3.81,35.56) 15.066,35.56 16.07,34.556 16.07,33.841 v1(17.018,32.893)
NetR10_2: "Trimmpoti 2.2" R10.2 U4.4 | length 41.1
  Top Layer w0.254: v1(1.651,26.162) 1.651,27.98 2.013,28.342 2.013,29.826 2.413,30.226 U4.4
  Bottom Layer w0.254: v1(1.651,26.162) 3.302,26.162 11.719,17.745 12.521,17.745 16.637,13.629 16.637,12.764 20.407,8.994 24.139,8.994 25.176,10.031 28.067,10.031
NetR11_2: R11.2 R12.1 U4.3 | length 26.5
  Top Layer w0.254: U4.3 5.512,31.496 6.35,32.334 6.35,33.02 9.398,36.068 12.827,36.068 13.293,35.602 13.293,35.393 R11.2 14.285,35.12 14.474,35.31 16.038,35.31 18.034,33.314 18.034,31.329 15.153,28.448 13.803,28.448 13.568,28.683 12.189,28.683 R12.1
NetR13_2: R13.2 T1.1 | length 1.4
  Top Layer w0.254: R13.2 54.998,19.444 T1.1
NetR14_1: R14.1 T1.3 | length 7.1
  Top Layer w0.254: R14.1 51.153,22.831 51.153,22.34 52.919,20.574 53.862,20.574 54.798,21.51 T1.3
NetR14_2: R14.2 Relay1.1 | length 23.8
  Top Layer w0.254: R14.2 48.68,21.088 45.212,17.62 45.212,13.843 46.228,12.827 51.435,12.827 52.324,11.938 52.324,11.038 51.565,10.278 49.161,10.278 Relay1.1
NetR15_2: R15.2 Relay1.2 | length 15.1
  Top Layer w0.254: R15.2 46.526,20.364 44.45,18.288 44.45,13.843 46.788,11.505 Relay1.2
NetR18_2: R18.2 T2.1 | length 2.3
  Top Layer w0.254: T2.1 48.618,29.603 49.474,28.747 R18.2
NetR19_1: R19.1 T2.3 | length 2.8
  Top Layer w0.254: T2.3 47.117,28.233 47.168,28.182 47.244,28.182 48.185,27.241 48.801,27.241 49.099,26.943 R19.1
NetR21_2: R21.2 T3.1 | length 1.9
  Top Layer w0.254: T3.1 42.45,20.985 42.949,21.485 R21.2
NetR22_1: R22.1 T3.3 | length 1.5
  Top Layer w0.254: R22.1 38.648,21.485 T3.3
NetR24_1: R24.1 R25.2 U8.8 | length 3.7
  Top Layer w0.254: R25.2 2.323,9.385 U8.8
NetR26_2: R26.2 R27.1 U8.1 | length 19.8
  Top Layer w0.254: U8.1 3.924,4.585 0.889,7.62 0.889,11.811 3.429,14.351 7.043,14.351 R26.2 7.245,14.149 R27.1
NetR28_1: R28.1 R29.2 U8.4 | length 4.7
  Top Layer w0.254: U8.4 14.254,4.585 R29.2
NetR30_2: R30.2 R31.1 U8.3 | length 15.8
  Top Layer w0.254: v1(6.858,2.032) 8.465,2.032 8.509,1.988 U8.3 ; R31.1 11.176,11.109 11.176,8.26 v1(11.055,8.139)
  Bottom Layer w0.254: v1(6.858,2.032) 11.176,6.35 11.176,8.018 v1(11.055,8.139)
NetR32_1: R32.1 TPSShrtGND.2 | length 1.8
  Top Layer w0.254: TPSShrtGND.2 34.252,2.627 R32.1
NetR32_2: R32.2 T4.2 | length 1.7
  Top Layer w0.254: R32.2 35.621,2.746 T4.2
NetR33_1: R33.1 T5.2 | length 2
  Top Layer w0.254: T5.2 8.067,28.188 R33.1
NetR33_2: R33.2 TPS>25%.2 | length 2
  Top Layer w0.254: R33.2 10.007,26.627 TPS>25%.2
NetR34_2: R34.2 T6.2 | length 1.7
  Top Layer w0.254: R34.2 39.731,4.253 T6.2
NetR35_1: R35.1 T7.2 | length 2
  Top Layer w0.254: T7.2 7.911,24.198 R35.1
NetR36_1: R36.1 T8.2 | length 1.9
  Top Layer w0.254: R36.1 45.4,2.606 T8.2
NetR37_2: R37.2 T9.2 | length 1.6
  Top Layer w0.254: T9.2 16.116,16.571 R37.2
SDBSPDin: Conn1.5 J5SDin.1 Relay1.3 | length 28.2
  Top Layer w0.254: Conn1.5 23.768,34.061 23.768,31.634 J5SDin.1 ; v1(32.766,18.923) 32.766,18.727 37.338,14.155 Relay1.3
  Bottom Layer w0.254: J5SDin.1 27.293,28.109 27.758,28.109 32.766,23.101 v1(32.766,18.923)
SDBSPDout: "J6 SDout.1" Conn1.6 Relay1.4 Relay1.5 | length 44.8
  Top Layer w0.254: Conn1.6 27.906,32.923 27.906,30.48 ; Relay1.4 51.735,14.905 v1(52.578,15.748) 51.786,16.54 48.753,16.54 Relay1.5
  Bottom Layer w0.254: 27.906,30.48 42.638,15.748 v1(52.578,15.748)
Sensorfoult: Q2.9 Q3.2 R20.1 R21.1 | length 53.2
  Top Layer w0.254: v1(4.171,18.689) 4.203,18.721 6.236,18.721 Q3.2 ; Q2.9 27.073,27.791 27.073,25.92 v1(27.12,25.873) ; v1(31.242,21.971) 33.655,19.558 35.56,19.558 36.026,19.092 42.056,19.092 42.949,19.985 R21.1 43.149,19.985 43.93,20.766 43.93,22.042 43.882,22.091 R20.1
  Int2 w0.254: v1(4.171,18.689) 11.136,25.654 23.578,25.654 23.959,25.273 26.284,25.273 26.884,25.873 v1(27.12,25.873) 31.023,21.971 v1(31.242,21.971)
ShrtGNDdetection: Q2.1 Q2.6 | length 12.1
  Top Layer w0.254: v1(20.565,20.591) 20.701,20.727 Q2.1 ; Q2.6 27.051,21.938 28,20.989 28,20.514 v1(28.194,20.32)
  Int2 w0.254: v1(20.565,20.591) 27.648,20.591 27.919,20.32 v1(28.194,20.32)
TPS>25%: Q1.1 R5.2 T5.1 U1.5 | length 32.1
  Top Layer w0.254: T5.1 7.028,26.288 7.916,25.4 10.541,25.4 14.011,21.93 Q1.1 14.313,21.987 14.313,23.799 v1(14.645,24.13) ; U1.5 13.424,37.347 R5.2 13.589,37.512 v1(13.589,38.989)
  Int1 w0.254: v1(13.589,38.989) 13.589,34.069 13.208,33.688 13.208,25.567 v1(14.645,24.13)
TPSBPfoult: Q1.7 Q2.2 | length 7
  Top Layer w0.254: Q1.7@18.279,21.257 Q1.7 18.275,21.299 18.717,21.299 19.304,21.886 19.304,23.114 20.215,24.025 20.734,24.025 21.971,22.788 Q2.2 Q2.2@21.971,21.938
TPSin: "J3 TPSin.1" Conn1.3 R4.1 R38.1 U1.8 | length 34.2
  Top Layer w0.254: U1.8 13.391,41.157 R4.1 13.476,41.172 14.257,41.953 15.959,41.953 17.526,40.386 17.526,37.211 18.161,36.576 24.208,36.576 Conn1.3 25.731,36.884 ; R38.1 24.588,32.952 24.588,35.571 25.731,36.714 25.731,36.884 ; 30.9,30.48 30.9,31.715 25.731,36.884
TPSShrtGND: Q2.3 R6.2 T4.1 U1.7 | length 56.7
  Top Layer w0.254: U1.7 10.122,39.887 9.271,40.738 R6.2 10.278,43.697 v1(11.176,42.799) ; v1(22.606,24.13) 22.606,24.114 23.251,23.469 23.251,22.373 Q2.3 23.241,19.363 22.337,18.459 22.337,14.303 27.64,9 29.031,9 33.398,4.633 33.448,4.633 33.721,4.36 T4.1
  Bottom Layer w0.254: v1(11.176,42.799) 11.176,36.489 22.519,25.146 22.519,24.217 v1(22.606,24.13)
pads on no net: "Trimmpoti 2.3" Conn1. OP1.1 OP1.5 OP1.8 OP2.1 OP2.5 OP2.8 Trimmpoti.3

## Polygon pours and split planes (outlines as drawn)
GND on Int1 "GND_L02_P001" (solid, remove dead copper, pour order 1): 0,45.212 58.928,45.212 58.928,0 0,0
5V on Int2 "5V_L03_P002" (solid, remove dead copper, pour order 2): 0,45.237 58.928,45.237 58.928,0.025 0,0.025
GND on Bottom Layer "GND_L04_P003" (solid, remove dead copper, pour order 3): 0,45.237 58.928,45.237 58.928,0.025 0,0.025
GND on Top Layer "GND_L01_P004" (solid, remove dead copper, pour order 4): 0,45.212 58.928,45.212 58.928,0 0,0

## Other copper
Top Layer:
  pour cut-out: 0,14.986 1.778,14.986 1.778,19.812 0,19.812
  text "1" at 0.277,15.39 h1
Int1:
  pour cut-out: 0,14.986 1.778,14.986 1.778,19.812 0,19.812
  text "2" at 0.658,16.025 h1
Int2:
  pour cut-out: 0,14.961 1.778,14.961 1.778,19.787 0,19.787
  text "3" at 0.15,17.295 h1
Bottom Layer:
  pour cut-out: 0,14.961 1.778,14.961 1.778,19.787 0,19.787
  text "4" at 0.658,18.311 h1

## Silkscreen, mask and mechanical layers (free items; w line width, h text height)
Top Overlay:
  text "2" at 25.273,3.937 h1.52
  text "1" at 18.288,3.81 h1.52
Bottom Overlay:
  text "BSPD / Baltic Racing / Lukas Deeken / 10.2020" at 33.655,20.066 h1.52 r180
  text "1 Set TPS" at 32.512,6.985 h1.52
  text "2 Set Brake" at 33.02,0.508 h1.52